# Altium PCB Расположение компонентов.PcbDoc
Units mm, origin at the board's own origin, x right, y up, seen from the top; angles counter-clockwise.
Board outline 152.4 x 101.6 mm, 2 copper layers (Top Layer, Bottom Layer); 9 components, 0 nets, 52 pads, 0 vias.
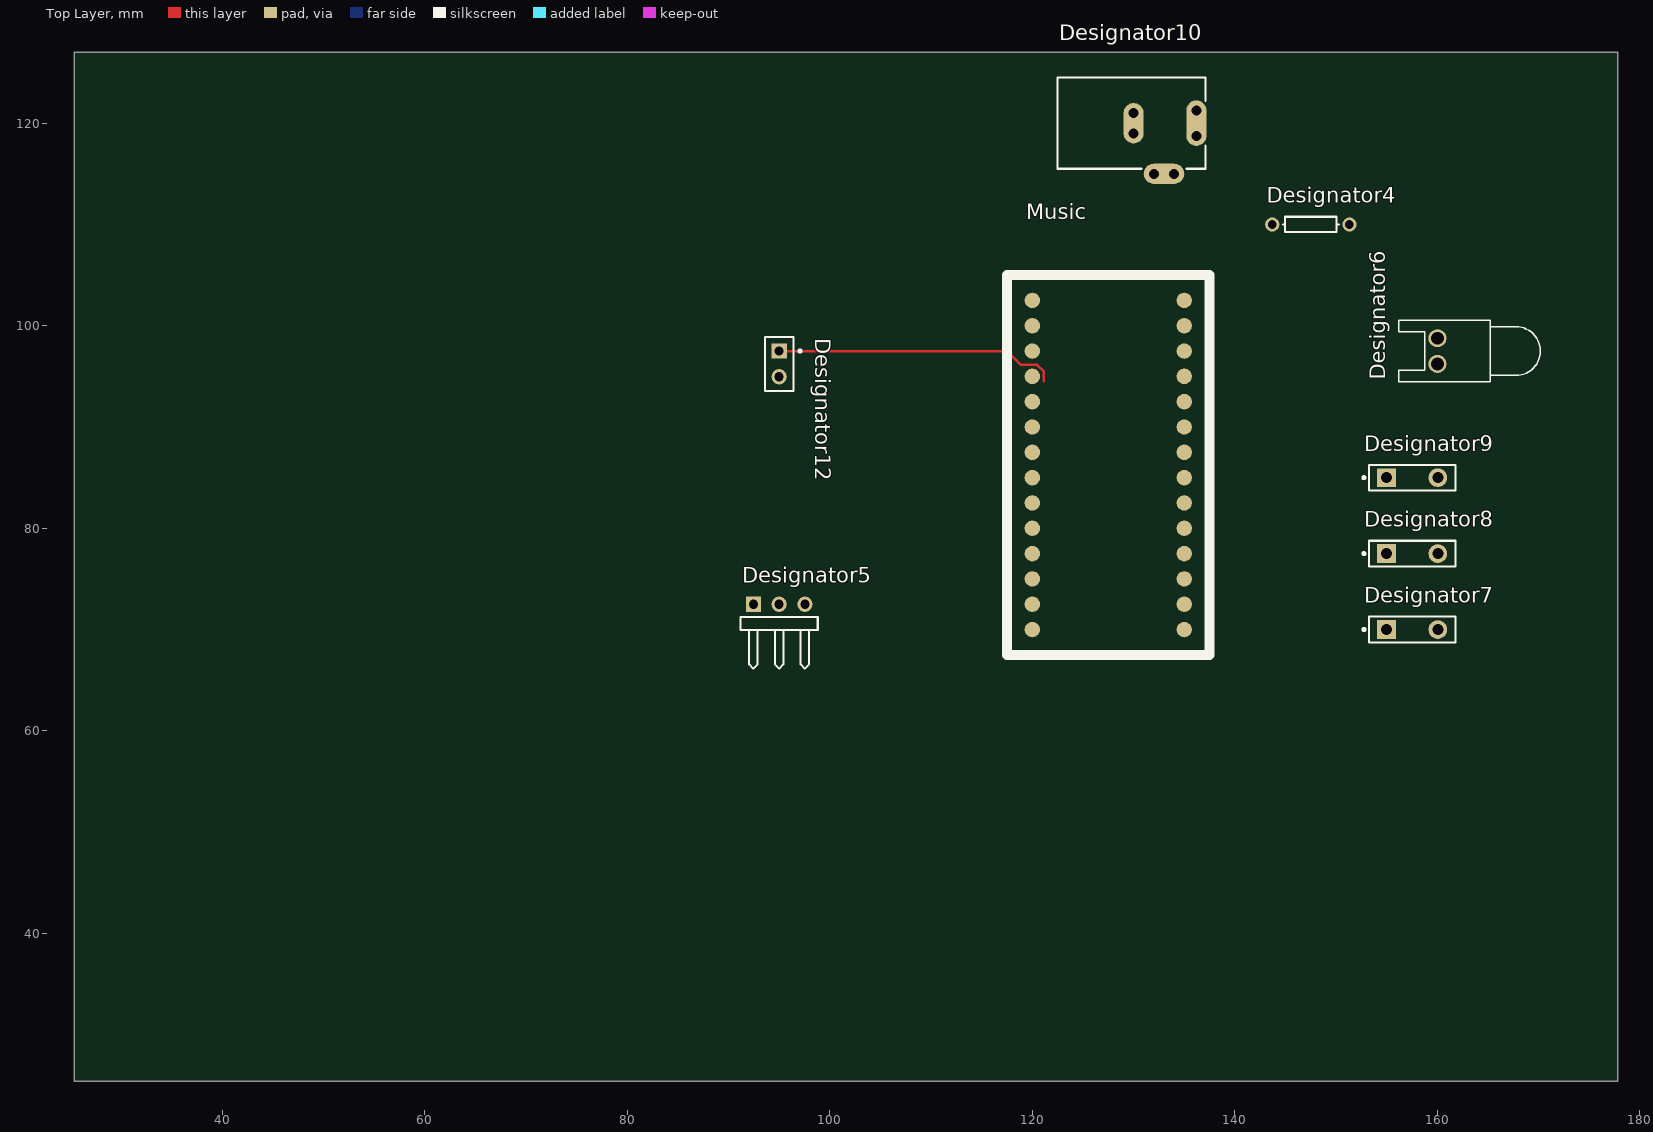
[diagram p0: Top Layer view]
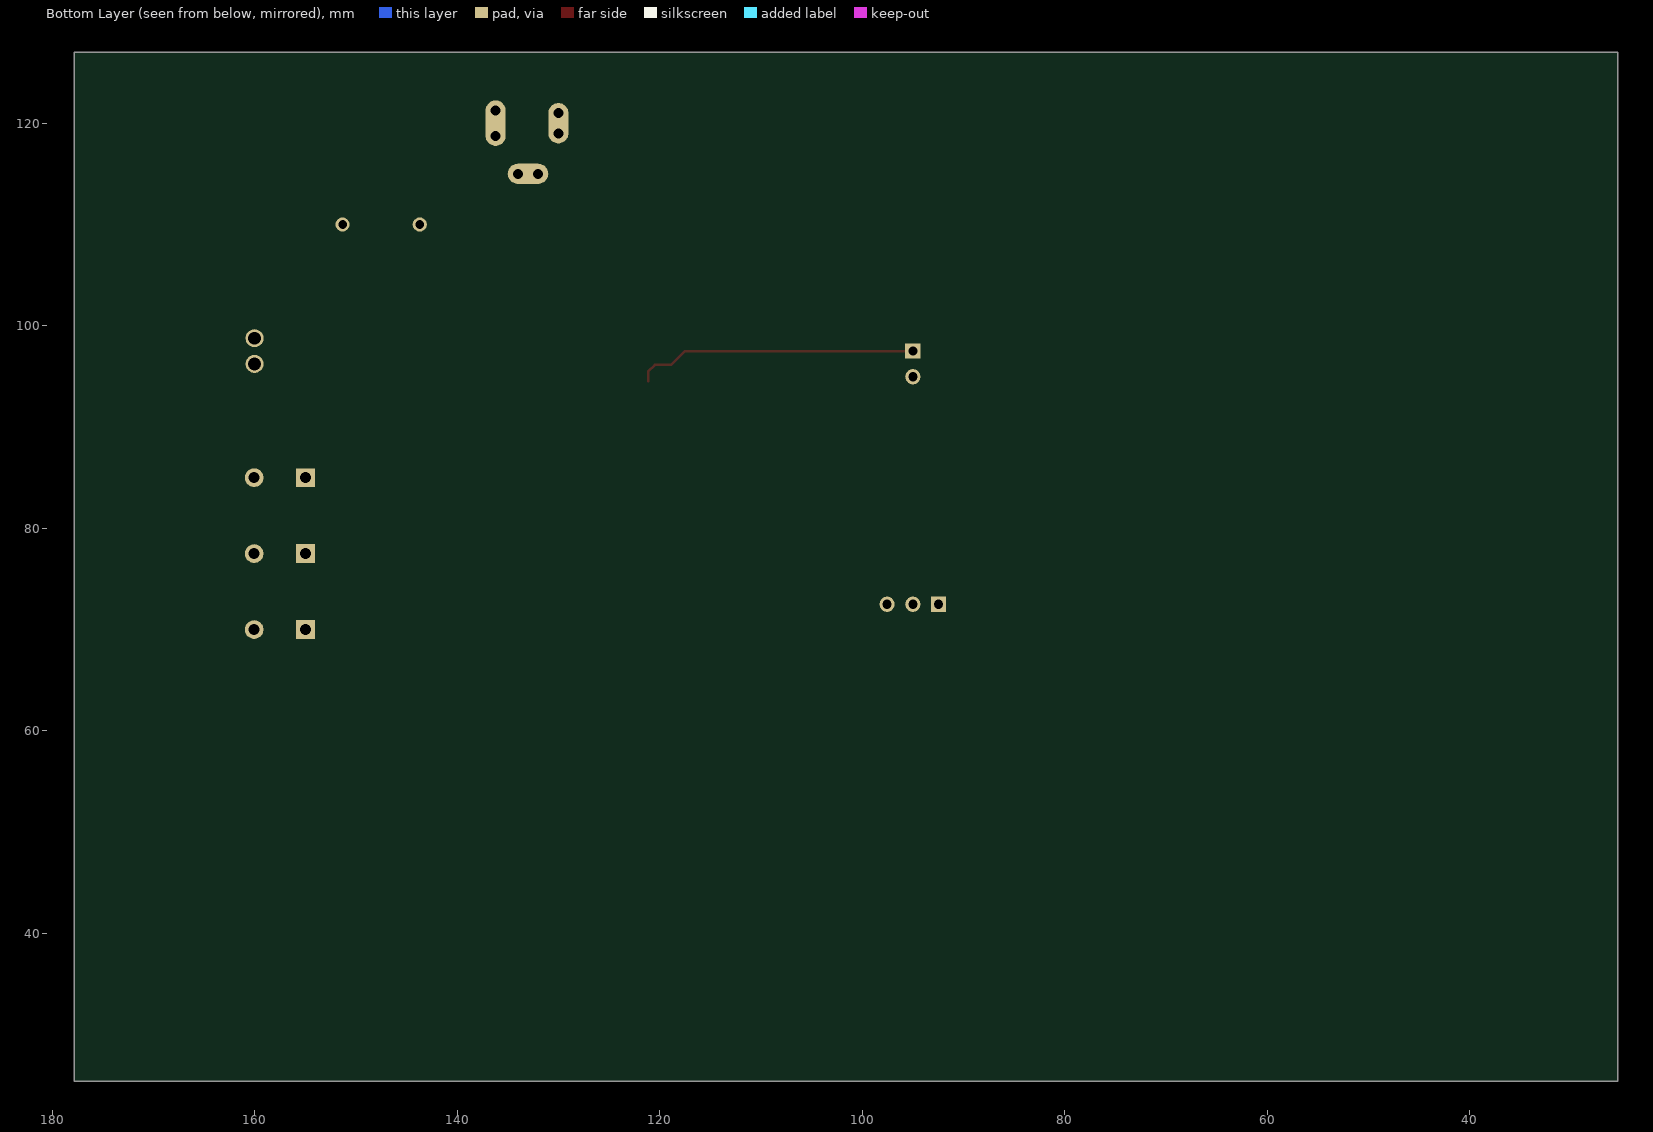
[diagram p1: Bottom Layer view, seen from below]

## Layer stack, top to bottom
Top Solder: solder mask 0.0102, Solder Resist, Dk 3.5
Top Layer: signal copper 0.0356
Dielectric 1: dielectric 0.32, FR-4, Dk 4.8
Bottom Layer: signal copper 0.0356
Bottom Solder: solder mask 0.0102, Solder Resist, Dk 3.5

## Board outline
25.4,25.4 177.8,25.4 177.8,127 25.4,127

## Design rules (kind name [scope] priority, off if disabled: settings)
Clearance [All] p1: gap=0.254 ignorepadtopadclearanceinfootprint=FALSE except(0: Arc-Hole Track-Hole SMDPad-Hole THPad-Hole Via-Hole Fill-Hole Poly-Hole Region-Hole Text-Hole)
PolygonConnect [All] p1: connectstyle=Relief reliefconductorwidth=0.254 reliefentries=4 polygonreliefangle="90 Angle" airgapwidth=0.254
RoutingVias [All] p1: holewidth=0.711 width=1.27 viastyle="Through Hole" minholewidth=0.711 minwidth=1.27 maxholewidth=0.711 maxwidth=1.27
SolderMaskExpansion [All] p1: expansion=0.102
Width [All] p1: maxlimit=0.254 minlimit=0.254 preferedwidth=0.254
30 further rules are at their usual default settings.

## Components (designator, comment, footprint, x,y, rotation, side; value= is the part's Value field where it differs from the comment)
Designator4 "Comment" AXIAL-0.3 147.5,110 r0 top
Designator5 "Comment" HDR1X3H 92.46,72.5 r0 top
Designator6 "Comment" LED-0 160,97.5 r90 top
Designator7 "Comment" SPST-2 157.5,70 r0 top
Designator8 "Comment" SPST-2 157.5,77.5 r0 top
Designator9 "Comment" SPST-2 157.5,85 r0 top
Designator10 "Comment" KLD-0202 122.5,120 r0 top
Designator12 "Comment" PIN2 95,97.5 r270 top
Music "Comment" WAYTRONIC_16P 120,102.5 r0 top

## Footprints (in the part's own frame and the unit in brackets; to place one, negate y for a bottom-side part, rotate by r counter-clockwise, add the part's x,y. Pads: shape width x height; smd on the part's side, far side on the other; paste and mask are expansions set on the pad)
AXIAL-0.3 [mm] "Axial Device, Thru-Hole; 2 Leads; 0.3 in Pin Spacing"
  round 1.4 hole 0.85: 1(-3.81,0) 2(3.81,0)
  silkscreen extent -2.77,-0.76 2.77,0.76
HDR1X3H [mm] "Connector; Header; 3 Position; Right Angle"
  rect 1.5x1.5 hole 0.9: 1(0,0)
  round 1.5 hole 0.9: 2(2.54,0) 3(5.08,0)
  silkscreen extent -1.27,-6.35 6.35,-1.27
KLD-0202 [mm] "DC Power Jack, 2.5mm, KLD Series, PCB Mount"
  oval 2x4.5 all layers, no hole: 1(13.7,0)
  round 1.5 hole 1: 1A(13.7,-1.25) 1B(13.7,1.25) 2A(7.5,-1) 2B(7.5,1) 3A(9.5,-5) 3B(11.5,-5)
  oval 2x4 all layers, no hole: 2(7.5,0)
  oval 4x2 all layers, no hole: 3(10.5,-5)
  silkscreen extent 0,-4.5 14.6,4.5
LED-0 [mil] "LED; 2 Leads"
  round 70 hole 50: 1(50,0) 2(-50,0)
  silkscreen extent -120,-400 120,150
PIN2 [mm] "Photosensitive Diode; 2 Leads"
  rect 1.5x1.5 hole 0.9: 1(0,0)
  round 1.5 hole 0.9: 2(2.54,0)
  silkscreen extent -1.4,-1.4 3.94,2.18
SPST-2 [mm] "Switch; 2 Leads"
  rect 1.85x1.85 hole 1.1: 1(-2.54,0)
  round 1.85 hole 1.1: 2(2.54,0)
  silkscreen extent -4.89,-1.27 4.28,1.27
WAYTRONIC_16P [mil]
  round 60 smd: 1(0,0) 2(0,-98.43) 3(0,-196.85) 4(0,-295.28) 5(0,-393.7) 6(0,-492.13) 7(0,-590.55) 8(0,-688.98) 9(0,-787.4) 10(0,-885.83) 11(0,-984.25) 12(0,-1082.68) 13(0,-1181.1) 14(0,-1279.53) 15(590.55,-1279.53) 16(590.55,-1181.1) 17(590.55,-1082.68) 18(590.55,-984.25) 19(590.55,-885.83) 20(590.55,-787.4) 21(590.55,-688.98) 22(590.55,-590.55) 23(590.55,-492.13) 24(590.55,-393.7) 25(590.55,-295.28) 26(590.55,-196.85) 27(590.55,-98.43) 28(590.55,0)
  silkscreen extent -98,-1378 689,98

## Nets (pads, with @x,y where several pads share a name; then routed paths per layer and width w, separated by ;. In a path a pad name is that pad's centre, name@x,y a point inside that pad or via, vN(x,y) a via of type N, cw(c..) or ccw(c..) an arc to the next point about the centre after c; other vN are vias at no path point)
pads on no net: Designator4.1 Designator4.2 Designator5.1 Designator5.2 Designator5.3 Designator6.1 Designator6.2 Designator7.1 Designator7.2 Designator8.1 Designator8.2 Designator9.1 Designator9.2 Designator10.1 Designator10.1A Designator10.1B Designator10.2 Designator10.2A Designator10.2B Designator10.3 Designator10.3A Designator10.3B Designator12.1 Designator12.2 Music.1 Music.2 Music.3 Music.4 Music.5 Music.6 Music.7 Music.8 Music.9 Music.10 Music.11 Music.12 Music.13 Music.14 Music.15 Music.16 Music.17 Music.18 Music.19 Music.20 Music.21 Music.22 Music.23 Music.24 Music.25 Music.26 Music.27 Music.28
copper on no net: | length 27.9
  Top Layer w0.254: 95,97.5 117.5,97.5 118.857,96.143 120.473,96.143 121.143,95.473 121.143,94.527

## Text inside footprints (layer, text, board x,y; h text height)
Designator10: Mechanical 1 "Mech 2 - Clearance, move to internal plane if present" at 122.786,125.066 h0.3; Mechanical 1 "Mech 1 - Slot cut-out" at 122.786,125.566 h0.3; Mechanical 1 "Assign keep-out area to slot" at 122.786,126.566 h0.3; Mechanical 1 "Alert PCB fab to slot details" at 122.786,126.066 h0.3
Music: Mechanical 1 "Designator" at 137.5,107.5 h1.52